# Altium PCB COREV1.1_pcb5_0.PcbDoc (part 5 of 14)
Units mil, origin at the board's own origin, x right, y up, seen from the top; angles counter-clockwise.
Board outline 2860 x 2420 mil, 6 copper layers (Top Layer, GND, SIGNAL_1, SIGNAL_2, POWER, Bottom Layer); 110 components, 241 nets, 882 pads, 697 vias.
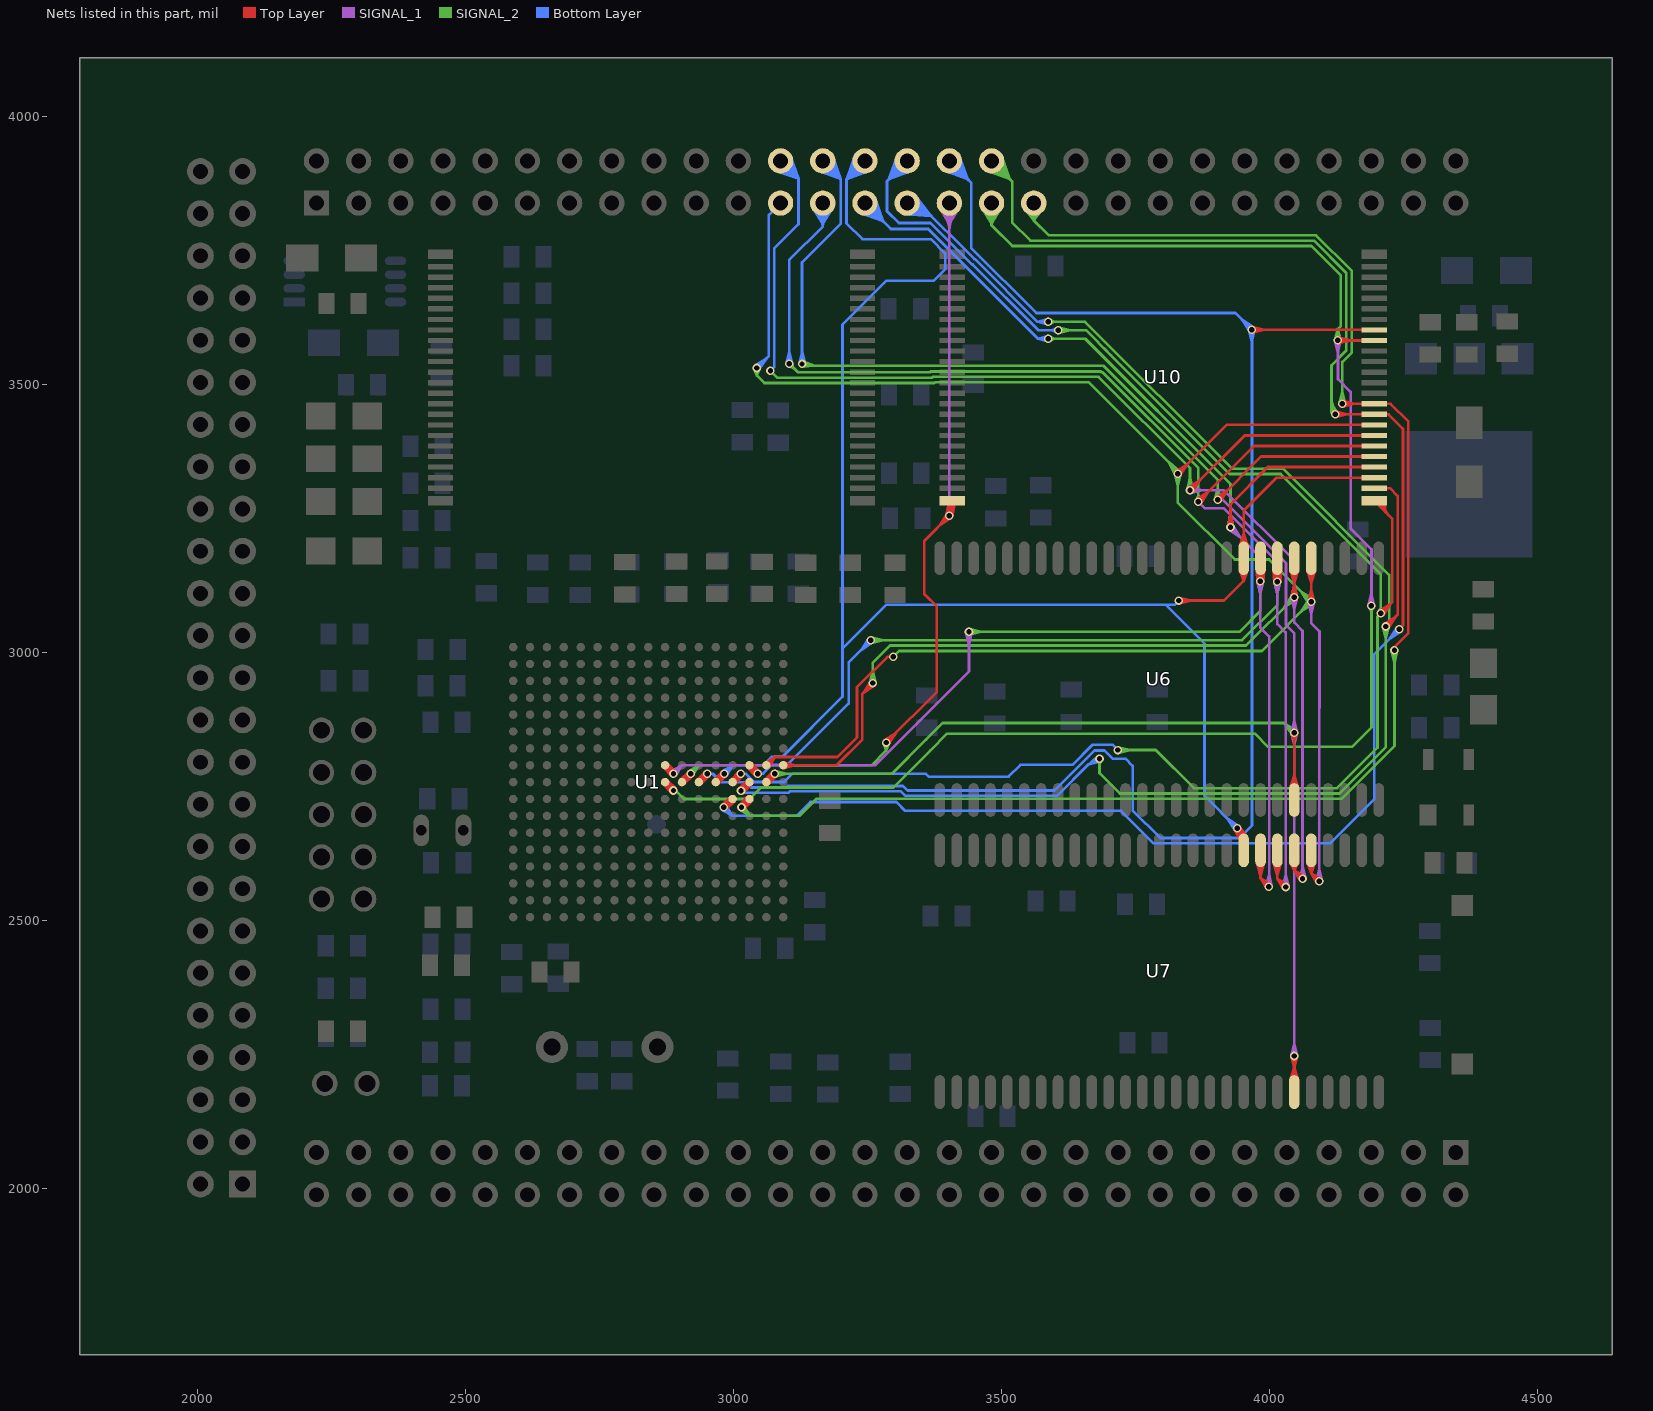
[diagram p9: the nets of this part, all layers, seen from the top]

## Via types
v1: diameter 16, hole 10, Top Layer to Bottom Layer, tented both sides, 638 vias
v2: diameter 30, hole 18, Top Layer to Bottom Layer, tented both sides, 56 vias
v3: diameter 16, hole 10, Top Layer to Bottom Layer, 2 vias
v4: diameter 30, hole 16, Top Layer to Bottom Layer, tented both sides, 1 vias

## Nets (pads, with @x,y where several pads share a name; then routed paths per layer and width w, separated by ;. In a path a pad name is that pad's centre, name@x,y a point inside that pad or via, vN(x,y) a via of type N, cw(c..) or ccw(c..) an arc to the next point about the centre after c; other vN are vias at no path point) (continued)
LADDR9: pad.PC23 U1.B8 U6.32 U7.32 U10.8 | length 5032.9
  Top Layer w5: U1.B8@3058.06,2793.87 3076.73,2805 ; U1.B8@3061.36,2795 ccw(c3061.36,2807.98) 3070.53,2798.8 ccw(c3079.71,2789.63) U1.B8@3066.73,2789.63 ; U1.B8@3064.11,2789.63 U1.B8@3061.36,2789.63 3076.73,2805 ; U1.B8@3065.6,2786.33 3076.73,2805 ; v1(3298,2992) 3287.08,2992 3230.5,2935.42 3230.5,2841.7 3193.8,2805 3076.73,2805 ; v1@3825.54,3337.77 3847.61,3352.11 v1@3833.27,3330.04 ; v1(3829,3333.5) 3920.28,3424.78 3948,3424.78 ; v1@3829,3339 ccw(c3829,3352.28) 3838.39,3342.89 ccw(c3847.78,3333.5) v1@3834.5,3333.5 ; 3944.78,3424.78 3948,3424.78 ; U7.32@4070.81,2607.99 4078.04,2587.96 ; U6.32@4070.78,3153.18 4078.04,3129.42 ; v1@4072.58,3095.66 4078.04,3118 v1@4083.5,3095.66 ; U7.32@4072.85,2604.07 cw(c4060.31,2591.53) 4078.04,2591.53 cw(c4095.77,2591.53) U7.32@4083.23,2604.07 ; U6.32@4072.85,3149.07 cw(c4060.31,3136.53) 4078.04,3136.53 cw(c4095.77,3136.53) U6.32@4083.23,3149.07 ; v1@4074.15,3098.89 ccw(c4064.76,3108.28) 4078.04,3108.28 ccw(c4091.32,3108.28) v1@4081.93,3098.89 ; U7.32@4078.04,2609.26 4078.04,2587.96 ; U7.32@4078.04,2630.91 4078.04,2587.96 ; v1(4078.04,3095) U6.32@4078.04,3175.91 ; U6.32@4078.04,3154.26 4078.04,3129.42 ; U7.32@4085.27,2607.99 4078.04,2587.96 ; U6.32@4085.3,3153.18 4078.04,3129.42 ; v1@4087.5,2573 ccw(c4074.22,2573) 4083.61,2582.39 ccw(c4093,2591.78) v1@4093,2578.5 ; v1@4088.64,2569.65 4078.04,2587.96 ; v1@4096.35,2577.36 4078.04,2587.96 ; 4157.2,3424.78 U10.8@4177.13,3424.78 ; U10.8@4175.41,3423.07 ccw(c4171.28,3418.94) 4171.28,3424.78 ccw(c4171.28,3430.63) U10.8@4175.41,3426.5 ; U10.8@4195.83,3424.78 3948,3424.78 ; 4078.04,2587.96 v1(4093,2573) 4078.04,2587.96
  SIGNAL_1 w5: v1@4072.58,3094.34 4078.04,3072 v1@4083.5,3094.34 ; v1@4074.15,3091.11 cw(c4064.76,3081.72) 4078.04,3081.72 cw(c4091.32,3081.72) v1@4081.93,3091.11 ; v1(4078.04,3095) 4078.04,3054.96 4093.54,3039.46 4093.54,2896.62 ; v1@4087.54,2573.66 4093,2596 v1@4098.46,2573.66 ; v1@4089.11,2576.89 ccw(c4079.72,2586.28) 4093,2586.28 ccw(c4106.28,2586.28) v1@4096.89,2576.89 ; v1(4093,2573) 4093,2896.08
  SIGNAL_2 w5: v1@3038.11,3529.92 3043.5,3517 ; v1@3039.61,3527.11 cw(c3030.22,3517.72) 3043.5,3517.72 cw(c3056.78,3517.72) v1@3047.39,3527.11 ; v1(3043.5,3531) 3043.5,3517 ; v1@3048.89,3529.92 3043.5,3517 ; v1(3298,2992) 3309,3003 3986.04,3003 v1(4078.04,3095) ; 3374.86,3503 3057.5,3503 3043.5,3517 ; 3376.36,3504.5 3662.92,3504.5 3829,3338.42 v1(3829,3333.5) ; 3816.13,3351.29 cw(c3798.34,3333.5) v1@3823.5,3333.5 ; v1@3823.54,3332.84 3829,3310.5 ; v1@3824.32,3330.6 3812.48,3354.94 ; 3824.67,3342.75 cw(c3815.41,3333.5) v1@3828.5,3333.5 ; v1@3825.11,3329.61 cw(c3815.72,3320.22) 3829,3320.22 cw(c3842.28,3320.22) v1@3832.89,3329.61 ; v1@3832.99,3337.28 3812.48,3354.94 ; v1@3834.46,3332.84 3829,3310.5 ; v1@4073.77,3091.54 4059.43,3113.61 ; v1@4073.77,3098.46 4059.43,3076.39 ; v1@4078.04,3089.5 ccw(c4078.04,3076.22) 4068.65,3085.61 ccw(c4059.26,3095) 4072.54,3095 ccw(c4059.26,3095) 4068.65,3104.39 ccw(c4078.04,3113.78) v1@4078.04,3100.5 ; v1@4081.5,3090.73 4059.43,3076.39 ; v1@4081.5,3099.27 4059.43,3113.61 ; 3812.48,3354.94 v1(3829,3333.5) ; 3829,3310.5 v1(3829,3333.5) ; v1(3829,3333.5) 3829,3280 3935.5,3173.5 3999.54,3173.5 v1(4078.04,3095) ; 4059.43,3076.39 v1(4078.04,3095) ; 4059.43,3113.61 v1(4078.04,3095)
  Bottom Layer w5: v1@3040.04,3535.27 3062.11,3549.61 v1@3047.77,3527.54 ; v1(3043.5,3531) 3066,3553.5 3066,3816.77 pad.PC23@3087.94,3838.71 ; v1@3043.5,3536.5 ccw(c3043.5,3549.78) 3052.89,3540.39 ccw(c3062.28,3531) v1@3049,3531
LADDR10: pad.PC24 U1.A8 U6.33 U7.33 U10.7 | length 5512.6
  Top Layer w5: U1.A8@3092.85,2789.63 3192.57,2789.63 3240.5,2837.56 3240.5,2922.5 v1@3260.5,2942.5 ; U1.A8@3093.49,2784.29 3115.73,2789.63 U1.A8@3093.49,2794.97 ; U1.A8@3096.65,2785.83 cw(c3105.83,2776.66) 3105.83,2789.63 cw(c3105.83,2802.6) U1.A8@3096.65,2793.43 ; 3249.9,2931.9 ccw(c3238.81,2943) v1@3254.5,2943 ; 3252.32,2934.32 cw(c3260,2926.64) v1@3260,2937.5 ; v1@3255.63,2946.34 3242.08,2924.08 ; v1(3260,2943) 3242.08,2924.08 ; v1@3263.57,2938.82 3242.08,2924.08 ; v1@3848.54,3307.27 3870.61,3321.61 v1@3856.27,3299.54 ; v1(3852,3303) 3954.1,3405.1 U10.7@4195.83,3405.1 ; v1@3852,3308.5 ccw(c3852,3321.78) 3861.39,3312.39 ccw(c3870.78,3303) v1@3857.5,3303 ; U6.33@4039.28,3153.18 4046.54,3129.42 ; U7.33@4039.4,2607.55 4046.54,2593.46 ; v1@4041.08,3103.66 4046.54,3126 v1@4052,3103.66 ; U6.33@4041.35,3149.07 cw(c4028.82,3136.53) 4046.54,3136.53 cw(c4064.27,3136.53) U6.33@4051.74,3149.07 ; U7.33@4041.81,2603.65 cw(c4033.21,2593.46) 4046.54,2593.46 ; v1@4042.65,3106.89 ccw(c4033.27,3116.28) 4046.54,3116.28 ccw(c4059.82,3116.28) v1@4050.43,3106.89 ; U7.33@4046.54,2609.26 4046.54,2593.46 ; U7.33@4046.54,2630.91 4046.54,2593.46 ; v1(4046.54,3103) U6.33@4046.54,3175.91 ; U6.33@4046.54,3154.26 4046.54,3129.42 ; U7.33@4051.28,2603.65 ccw(c4059.88,2593.46) 4046.54,2593.46 ; U7.33@4053.69,2607.55 4046.54,2593.46 ; U6.33@4053.81,3153.18 4046.54,3129.42 ; v1@4056.5,2578 ccw(c4043.22,2578) 4052.61,2587.39 ccw(c4062,2596.78) v1@4062,2583.5 ; v1@4057.65,2574.63 4046.54,2593.46 ; v1@4065.37,2582.35 4046.54,2593.46 ; 4157.2,3405.1 U10.7@4177.13,3405.1 ; U10.7@4175.41,3403.39 ccw(c4171.28,3399.25) 4171.28,3405.1 ccw(c4171.28,3410.94) U10.7@4175.41,3406.81 ; 4046.54,2593.46 v1(4062,2578) 4046.54,2593.46
  SIGNAL_1 w5: v1(3852,3303) 3914.86,3303 4046.54,3171.31 v1(4046.54,3103) 4046.54,3055.96 4062.04,3040.46 4062.04,2873.04 4062,2873 v1(4062,2578) ; v1@3852.66,3297.54 3875,3303 v1@3852.66,3308.46 ; v1@3855.89,3299.11 cw(c3865.28,3289.72) 3865.28,3303 cw(c3865.28,3316.28) v1@3855.89,3306.89 ; v1@4041.08,3102.34 4046.54,3080 v1@4052,3102.34 ; v1@4041.08,3103.66 4046.54,3126 v1@4052,3103.66 ; v1@4042.65,3099.11 cw(c4033.27,3089.72) 4046.54,3089.72 cw(c4059.82,3089.72) v1@4050.43,3099.11 ; v1@4042.65,3106.89 ccw(c4033.27,3116.28) 4046.54,3116.28 ccw(c4059.82,3116.28) v1@4050.43,3106.89 ; v1@4056.54,2578.66 4062,2601 v1@4067.46,2578.66 ; v1@4058.11,2581.89 ccw(c4048.72,2591.28) 4062,2591.28 ccw(c4075.28,2591.28) v1@4065.89,2581.89
  SIGNAL_2 w5: v1(3069,3525.5) 3081.5,3513 3370.72,3513 3372.22,3514.5 3681.5,3514.5 3852,3344 v1(3852,3303) ; v1@3254.54,2943.67 3260.06,2966 ; v1@3256.11,2946.89 ccw(c3246.59,2956.41) 3260.06,2956.41 ; v1(3260,2943) 3260.06,2966 ; v1@3260.06,2943.06 3260.06,2981.06 3292,3013 3956.54,3013 v1(4046.54,3103) 4027.94,3084.39 ; 3260.06,2956.14 ccw(c3273.14,2956.14) v1@3263.89,2946.89 ; v1@3265.46,2943.64 3260.06,2966 ; v1@3846.54,3303.66 3852,3326 v1@3857.46,3303.66 ; v1@3848.11,3306.89 ccw(c3838.72,3316.28) 3852,3316.28 ccw(c3865.28,3316.28) v1@3855.89,3306.89 ; v1@4041.04,3103 cw(c4027.77,3103) 4037.15,3093.61 cw(c4046.54,3084.22) v1@4046.54,3097.5 ; v1@4042.27,3106.46 4027.94,3084.39 ; v1@4050.01,3098.73 4027.94,3084.39
  Bottom Layer w5: v1(3069,3525.5) 3076,3532.5 3076,3754 3121.5,3799.5 3121.5,3883.89 ; pad.PC24@3076.7,3899.56 3121.5,3883.89 ; pad.PC24@3078.64,3904.28 3121.5,3883.89 ; pad.PC24@3081.05,3908.72 3121.5,3883.89 ; pad.PC24@3083.9,3912.85 3121.5,3883.89 ; pad.PC24@3087.94,3917.45 3121.5,3883.89 ; pad.PC24@3088.52,3906.34 cw(c3089.69,3883.86) 3105.61,3899.78 cw(c3121.53,3915.7) pad.PC24@3099.04,3916.87 ; pad.PC24@3088.78,3901.35 cw(c3090.47,3868.75) 3113.55,3891.83 cw(c3136.63,3914.91) pad.PC24@3104.04,3916.61 ; pad.PC24@3089.04,3896.35 cw(c3091.26,3853.65) 3121.5,3883.89 ; pad.PC24@3092.54,3921.49 3121.5,3883.89 ; pad.PC24@3096.67,3924.34 3121.5,3883.89 ; pad.PC24@3101.11,3926.75 3121.5,3883.89 ; pad.PC24@3105.82,3928.69 3121.5,3883.89 ; pad.PC24@3109.03,3916.35 ccw(c3151.73,3914.12) 3121.5,3883.89
LADDR11: pad.PC25 U1.C8 U6.34 U7.34 U10.6 | length 5719.7
  Top Layer w5: U1.C8@3029.86,2784.26 cw(c3029.86,2772.47) 3038.2,2780.8 ; U1.C8@3035.24,2789.63 ccw(c3049.4,2789.63) v1@3039.38,2779.62 ; v1@3039.5,2774 ccw(c3026.22,2774) 3035.61,2783.39 ccw(c3045,2792.78) v1@3045,2779.5 ; v1@3039.92,2771.88 U1.C8@3034.15,2792.86 ; v1@3040.6,2770.7 U1.C8@3029.86,2789.63 ; v1@3040.64,2770.64 U1.C8@3029.86,2789.14 ; v1@3041.54,2769.73 U1.C8@3026.49,2785.44 ; v1@3047.28,2779.01 U1.C8@3026.49,2785.44 ; v1@3048.36,2778.36 U1.C8@3029.86,2789.14 ; v1@3048.44,2778.3 U1.C8@3029.86,2789.63 ; v1@3049.38,2777.32 U1.C8@3034.15,2792.86 ; v1@3864.04,3285.77 3886.11,3300.11 v1@3871.77,3278.04 ; v1(3867.5,3281.5) 3971.41,3385.41 U10.6@4195.83,3385.41 ; v1@3867.5,3287 ccw(c3867.5,3300.28) 3876.89,3290.89 ccw(c3886.28,3281.5) v1@3873,3281.5 ; U7.34@4007.79,2608.18 4015.05,2584.42 ; v1@4009.54,3132.66 4015,3155 4020.46,3132.66 U6.34@4015.05,3154.26 ; v1@4009.54,3132.69 U6.34@4015.05,3154.26 ; v1@4009.62,3130.88 U6.34@4007.8,3153.07 ; U7.34@4009.86,2604.07 cw(c3997.32,2591.53) 4015.05,2591.53 cw(c4032.77,2591.53) U7.34@4020.24,2604.07 ; U6.34@4009.86,3149.07 cw(c3997.44,3136.65) v1@4015,3136.65 ; v1@4010.07,3134.43 U6.34@4022.29,3153.03 ; v1@4011.11,3135.89 ccw(c4001.72,3145.28) 4015,3145.28 ccw(c4028.28,3145.28) v1@4018.89,3135.89 ; v1@4015,3136.42 cw(c4032.89,3136.42) U6.34@4020.24,3149.07 ; U7.34@4015.05,2609.26 4015.05,2584.42 ; U7.34@4015.05,2630.91 4015.05,2577.95 ; U6.34@4015.05,3175.91 U6.34@4015.05,3175.91 v1(4015,3132) ; v1@4019.95,3134.41 U6.34@4007.8,3153.07 ; v1@4020.38,3130.86 U6.34@4022.29,3153.03 ; U7.34@4022.31,2608.18 4015.05,2584.42 ; v1@4025.05,2562.45 ccw(c4011.77,2562.45) 4021.16,2571.84 ccw(c4030.55,2581.23) v1@4030.55,2567.95 ; v1@4026.2,2559.08 4015.05,2577.95 ; v1@4033.92,2566.8 4015.05,2577.95 ; 4157.2,3385.41 U10.6@4177.13,3385.41 ; U10.6@4175.41,3383.7 ccw(c4171.28,3379.57) 4171.28,3385.41 ccw(c4171.28,3391.26) U10.6@4175.41,3387.12 ; U1.C8@3026.49,2785.44 v1(3045,2774) ; U1.C8@3026.49,2785.44 v1(3045,2774) ; U1.C8@3029.86,2789.14 U1.C8@3029.86,2789.63 ; U1.C8@3029.86,2789.14 v1(3045,2774) ; U1.C8@3029.86,2789.14 v1(3045,2774) ; U1.C8@3029.86,2789.63 v1(3045,2774) ; U1.C8@3029.86,2789.63 v1(3045,2774) ; U1.C8@3034.15,2792.86 v1(3045,2774) ; U1.C8@3034.15,2792.86 v1(3045,2774) ; U6.34@4007.8,3153.07 v1(4015,3132) ; v1(4015,3132) U6.34@4022.29,3153.03 ; v1(4015,3132) U6.34@4015.05,3154.26 ; 4015.05,2577.95 v1(4030.55,2562.45) 4015.05,2577.95
  SIGNAL_1 w5: v1(3867.5,3281.5) v1@3868,3281 ; v1@3869.8,3282.8 v1@3868,3281 ; v1@4009.54,3131.34 4015,3109 v1@4020.46,3131.34 ; v1@4009.54,3132.66 4015,3155 v1@4020.46,3132.66 ; v1@4011.11,3128.11 cw(c4001.72,3118.72) 4015,3118.72 cw(c4028.28,3118.72) v1@4018.89,3128.11 ; v1@4011.11,3135.89 ccw(c4001.72,3145.28) 4015,3145.28 ccw(c4028.28,3145.28) v1@4018.89,3135.89 ; v1@4025.09,2563.11 4030.55,2585.45 v1@4036.01,2563.11 ; v1@4026.66,2566.34 ccw(c4017.27,2575.73) 4030.55,2575.73 ccw(c4043.83,2575.73) v1@4034.44,2566.34 ; v1(4030.55,2562.45) 4030.55,3037.53 4015,3053.07 v1(4015,3132) 4015,3169 3915,3269 3880,3269 v1@3868,3281
  SIGNAL_2 w5: v1@3104,3533.5 cw(c3104,3520.22) 3113.39,3529.61 cw(c3122.78,3539) v1@3109.5,3539 ; v1(3104,3539) 3120,3523 3366.57,3523 3368.07,3524.5 3685.64,3524.5 3687.14,3523 3688.86,3523 3867.5,3344.36 v1(3867.5,3281.5) ; v1(3256.5,3023) 3949,3023 4015.05,3089.05 v1(4015,3132) v1(4015,3132) 4015.05,3109 ; v1@3257.16,3017.54 3279.5,3023 v1@3257.16,3028.46 ; v1@3260.39,3019.11 cw(c3269.78,3009.72) 3269.78,3023 cw(c3269.78,3036.28) v1@3260.39,3026.89 ; v1@3863.61,3285.39 ccw(c3854.22,3294.78) 3867.5,3294.78 ccw(c3880.78,3294.78) v1@3871.39,3285.39 ; v1@4009.54,3131.33 4015.05,3109 ; v1@4011.11,3128.11 cw(c4001.61,3118.61) 4015.05,3118.61 ; 4015.05,3118.84 cw(c4028.16,3118.84) v1@4018.89,3128.11 ; v1@4020.46,3131.35 4015.05,3109
  Bottom Layer w5: v1(3045,2774) 3055.3,2774 3071.3,2790 3100,2790 3215,2905 3215,2981.5 v1(3256.5,3023) 3237.89,3004.39 ; v1@3098.54,3539.66 3104,3562 v1@3109.46,3539.66 ; v1@3100.11,3542.89 ccw(c3090.72,3552.28) 3104,3552.28 ccw(c3117.28,3552.28) v1@3107.89,3542.89 ; v1(3104,3539) 3104,3732.5 3166.68,3795.18 ; pad.PC25@3146.36,3832.93 3166.68,3800.09 ; pad.PC25@3150.91,3835.34 3166.68,3800.09 ; pad.PC25@3153.61,3822.12 cw(c3132.39,3795.18) 3166.68,3795.18 ; pad.PC25@3155.67,3837.11 3166.68,3800.09 ; pad.PC25@3156.7,3826.04 cw(c3140.51,3805.48) 3166.68,3805.48 cw(c3192.85,3805.48) pad.PC25@3176.65,3826.04 ; pad.PC25@3160.58,3838.22 3166.68,3800.09 ; pad.PC25@3172.78,3838.22 3166.68,3800.09 ; pad.PC25@3177.68,3837.11 3166.68,3800.09 ; pad.PC25@3179.75,3822.12 ccw(c3200.97,3795.18) 3166.68,3795.18 ; pad.PC25@3182.44,3835.34 3166.68,3800.09 ; pad.PC25@3186.99,3832.93 3166.68,3800.09 ; v1@3251,3023 cw(c3237.72,3023) 3247.11,3013.61 cw(c3256.5,3004.22) v1@3256.5,3017.5 ; v1@3252.23,3026.46 3237.89,3004.39 ; v1@3259.96,3018.73 3237.89,3004.39 ; 3166.68,3795.18 pad.PC25@3166.68,3838.71 3166.68,3800.09
LADDR12: pad.PC26 U1.B9 U6.22 U7.22 U10.5 | length 5876.2
  Top Layer w5: U1.B9@3061.36,2763.51 ccw(c3061.36,2776.48) 3070.53,2767.31 ccw(c3079.71,2758.13) U1.B9@3066.73,2758.13 ; v1@3071.5,2773.78 cw(c3058.22,2773.78) 3067.61,2764.39 cw(c3077,2755) v1@3077,2768.28 ; v1@3071.97,2776 U1.B9@3065.59,2754.82 ; v1@3072.66,2777.15 U1.B9@3061.36,2758.13 ; v1@3073.6,2778.1 U1.B9@3058.05,2762.37 ; v1@3079.23,2768.75 U1.B9@3058.05,2762.37 ; v1@3080.38,2769.43 U1.B9@3061.36,2758.13 ; v1@3081.32,2770.38 U1.B9@3065.59,2754.82 ; v1@3900.54,3289.27 3922.61,3303.61 v1@3908.27,3281.54 ; v1(3904,3285) 3984.73,3365.73 U10.5@4195.83,3365.73 ; v1@3904,3290.5 ccw(c3904,3303.78) 3913.39,3294.39 ccw(c3922.78,3285) v1@3909.5,3285 ; U7.22@4039.28,2202.47 4046.54,2226.23 ; U6.22@4039.28,2747.47 4046.54,2771.23 ; v1@4041.08,2246.34 4046.54,2224 v1@4052,2246.34 ; v1@4041.11,2848.96 4046.5,2836.04 ; U7.22@4041.35,2206.58 ccw(c4028.82,2219.11) 4046.54,2219.11 ccw(c4064.27,2219.11) U7.22@4051.74,2206.58 ; U6.22@4041.35,2751.58 ccw(c4028.82,2764.11) 4046.54,2764.11 ccw(c4064.27,2764.11) U6.22@4051.74,2751.58 ; v1@4042.61,2846.15 cw(c4033.22,2836.77) 4046.5,2836.77 cw(c4059.78,2836.77) v1@4050.39,2846.15 ; v1@4042.65,2243.11 cw(c4033.27,2233.72) 4046.54,2233.72 cw(c4059.82,2233.72) v1@4050.43,2243.11 ; v1(4046.5,2850.04) 4046.5,2836.04 ; U7.22@4046.54,2179.73 v1(4046.54,2247) ; U7.22@4046.54,2201.39 4046.54,2226.23 ; U6.22@4046.54,2724.73 4046.54,2836 ; U6.22@4046.54,2746.39 4046.54,2771.23 ; v1@4051.89,2848.96 4046.5,2836.04 ; U7.22@4053.81,2202.47 4046.54,2226.23 ; U6.22@4053.81,2747.47 4046.54,2771.23 ; 4157.2,3365.73 U10.5@4177.13,3365.73 ; U10.5@4175.41,3364.02 ccw(c4171.28,3359.88) 4171.28,3365.73 ccw(c4171.28,3371.57) U10.5@4175.41,3367.44 ; U1.B9@3058.05,2762.37 v1(3077,2773.78) ; U1.B9@3058.05,2762.37 v1(3077,2773.78) ; U1.B9@3061.36,2758.13 v1(3077,2773.78) ; U1.B9@3061.36,2758.13 v1(3077,2773.78) ; U1.B9@3065.59,2754.82 v1(3077,2773.78) ; U1.B9@3065.59,2754.82 v1(3077,2773.78)
  SIGNAL_1 w5: 3913.14,3285 4031,3167.14 4031,3051.22 4046.54,3035.67 4046.54,2850.09 v1(4046.5,2850.04) ; v1@4041.04,2849.39 4046.5,2827.04 v1@4051.96,2849.39 ; v1@4041.04,2850.71 4046.54,2873.04 ; v1@4041.08,2247.65 4046.5,2270 ; v1@4042.61,2846.15 cw(c4033.22,2836.77) 4046.5,2836.77 cw(c4059.78,2836.77) v1@4050.39,2846.15 ; v1@4042.61,2853.93 ccw(c4033.12,2863.43) 4046.54,2863.43 ; v1@4042.65,2250.89 ccw(c4033.37,2260.17) 4046.5,2260.17 ; v1(4046.54,2247) v1(4046.5,2850.04) ; 4046.5,2260.38 ccw(c4059.93,2260.38) v1@4050.43,2250.89 ; v1(4046.54,2247) 4046.5,2270 ; 4046.54,2863.22 ccw(c4059.67,2863.22) v1@4050.39,2853.93 ; v1@4051.96,2850.69 4046.54,2873.04 ; v1@4052,2247.67 4046.5,2270 ; v1(4046.5,2850.04) 4046.54,2873.04
  SIGNAL_2 w5: v1(3077,2773.78) 3295.43,2773.78 3359.15,2837.5 ; v1@3077.66,2768.32 3100,2773.78 v1@3077.66,2779.24 ; v1@3080.89,2769.89 cw(c3090.28,2760.5) 3090.28,2773.78 cw(c3090.28,2787.05) v1@3080.89,2777.67 ; v1@3127.83,3533 3152.17,3535 ; v1(3128,3538.5) 3152.17,3535 ; v1@3128.35,3538.85 ccw(c3137.66,3548.16) 3137.66,3535 ; v1@3129.4,3543.82 3152.17,3535 ; v1@3131.5,3535 3691,3535 3904,3322 v1(3904,3285) ; v1@3131.89,3542.39 ccw(c3149.73,3560.23) 3149.73,3535 ; 3359.21,2837.5 3390.21,2868.5 4028.04,2868.5 ; v1@3898.54,3285.66 3904,3308 v1@3909.46,3285.66 ; v1@3900.11,3288.89 ccw(c3890.72,3298.28) 3904,3298.28 ccw(c3917.28,3298.28) v1@3907.89,3288.89 ; v1@4041,2850.04 ccw(c4027.72,2850.04) 4037.11,2859.43 ccw(c4046.5,2868.82) v1@4046.5,2855.54 ; v1@4042.22,2846.59 4028.04,2868.5 ; v1@4049.96,2854.32 4028.04,2868.5 ; 4028.04,2868.5 v1(4046.5,2850.04) 4028.04,2868.5
  Bottom Layer w5: v1@3122.54,3539.16 3128,3561.5 v1@3133.46,3539.16 ; v1@3124.11,3542.39 ccw(c3114.72,3551.78) 3128,3551.78 ccw(c3141.28,3551.78) v1@3131.89,3542.39 ; v1(3128,3538.5) 3128,3728 3200.5,3800.5 3200.5,3883.63 ; pad.PC26@3155.41,3899.58 3200.5,3883.63 ; pad.PC26@3157.36,3904.29 3200.5,3883.63 ; pad.PC26@3159.78,3908.72 3200.5,3883.63 ; pad.PC26@3162.64,3912.85 3200.5,3883.63 ; pad.PC26@3166.68,3917.45 3200.5,3883.63 ; pad.PC26@3167.19,3906.34 cw(c3168.26,3883.41) 3184.49,3899.64 cw(c3200.72,3915.87) pad.PC26@3177.79,3916.93 ; pad.PC26@3167.42,3901.34 cw(c3168.97,3868.11) 3192.49,3891.63 cw(c3216.02,3915.16) pad.PC26@3182.78,3916.7 ; pad.PC26@3167.66,3896.35 cw(c3169.67,3852.8) 3200.5,3883.63 ; pad.PC26@3171.28,3921.49 3200.5,3883.63 ; pad.PC26@3175.4,3924.34 3200.5,3883.63 ; pad.PC26@3179.84,3926.76 3200.5,3883.63 ; pad.PC26@3184.54,3928.72 3200.5,3883.63 ; pad.PC26@3187.78,3916.47 ccw(c3231.32,3914.45) 3200.5,3883.63
LADDR13: pad.PC27 U1.H8 U6.35 U7.35 U10.4 | length 5711.7
  Top Layer w5: U1.H8@2872.38,2784.26 cw(c2872.38,2771.28) 2881.56,2780.46 cw(c2890.73,2789.63) U1.H8@2877.76,2789.63 ; 2878.59,2783.42 cw(c2869.16,2773.99) v1@2882.5,2773.99 ; 2878.65,2783.36 ccw(c2888,2792.71) v1@2888,2779.49 ; v1@2882.97,2771.76 U1.H8@2876.62,2792.94 ; v1@2883.65,2770.62 U1.H8@2872.38,2789.63 ; v1@2884.6,2769.67 U1.H8@2869.07,2785.4 ; v1@2890.23,2779.02 U1.H8@2869.07,2785.4 ; v1@2891.38,2778.33 U1.H8@2872.38,2789.63 ; v1@2892.33,2777.38 U1.H8@2876.62,2792.94 ; v1@3922.04,3234.16 3927.5,3256.5 v1@3932.96,3234.16 ; v1@3923.61,3237.39 ccw(c3914.22,3246.78) 3927.5,3246.78 ccw(c3940.78,3246.78) v1@3931.39,3237.39 ; v1(3927.5,3233.5) 3927.5,3276.5 3997.04,3346.04 U10.4@4195.83,3346.04 ; U7.35@3976.29,2608.18 3983.55,2584.42 ; v1@3977.54,3133.66 3983,3156 v1@3988.46,3133.66 ; v1@3977.57,3133.85 U6.35@3983.55,3154.26 ; v1@3977.6,3131.95 U6.35@3976.29,3153.18 ; v1@3978.18,3135.65 U6.35@3990.75,3152.81 ; U7.35@3978.36,2604.07 cw(c3965.83,2591.53) 3983.55,2591.53 cw(c4001.28,2591.53) U7.35@3988.74,2604.07 ; U6.35@3978.36,3149.07 cw(c3967.16,3137.87) v1@3983,3137.87 ; v1@3979.11,3136.89 ccw(c3969.72,3146.28) 3983,3146.28 ccw(c3996.28,3146.28) v1@3986.89,3136.89 ; v1@3983,3135.2 cw(c4002.61,3135.2) U6.35@3988.74,3149.07 ; U7.35@3983.55,2609.26 3983.55,2584.42 ; U7.35@3983.55,2630.91 3983.55,2578.45 ; U6.35@3983.55,3175.91 3983,3175.36 v1(3983,3133) ; v1@3987.95,3135.4 U6.35@3976.29,3153.18 ; v1@3988.34,3131.68 U6.35@3990.75,3152.81 ; v1@3988.47,3133.57 U6.35@3983.55,3154.26 ; U7.35@3990.81,2608.18 3983.55,2584.42 ; v1@3993.5,2563 ccw(c3980.22,2563) 3989.61,2572.39 ccw(c3999,2581.78) v1@3999,2568.5 ; v1@3994.65,2559.63 3983.55,2578.45 ; v1@4002.37,2567.35 3983.55,2578.45 ; 4157.2,3346.04 U10.4@4177.13,3346.04 ; U10.4@4175.41,3344.33 ccw(c4171.28,3340.2) 4171.28,3346.04 ccw(c4171.28,3351.89) U10.4@4175.41,3347.75 ; U1.H8@2869.07,2785.4 v1(2888,2773.99) ; U1.H8@2869.07,2785.4 v1(2888,2773.99) ; U1.H8@2872.38,2789.63 v1(2888,2773.99) ; U1.H8@2872.38,2789.63 v1(2888,2773.99) ; U1.H8@2876.62,2792.94 v1(2888,2773.99) ; U1.H8@2876.62,2792.94 v1(2888,2773.99) ; U6.35@3976.29,3153.18 v1(3983,3133) ; v1(3983,3133) U6.35@3990.75,3152.81 ; v1(3983,3133) U6.35@3983.55,3154.26 ; 3983.55,2578.45 v1(3999,2563) 3983.55,2578.45
  SIGNAL_1 w5: v1@2884.66,2778.36 2903.75,2789.5 ; v1(2888,2773.99) 2903.75,2789.5 ; v1@2888,2779.49 ccw(c2888,2793.34) 2897.79,2783.54 ; v1@2888.24,2773.99 2903.75,2789.5 ; v1@2892.32,2770.58 2903.75,2789.5 ; v1@2893.5,2773.99 cw(c2906.21,2773.99) 2897.22,2782.97 ; 3168.5,2789.5 3141,2789.5 ; v1@3434.04,3037.84 3439.5,3015.5 v1@3444.96,3037.84 ; v1@3435.61,3034.61 cw(c3426.22,3025.22) 3439.5,3025.22 cw(c3452.78,3025.22) v1@3443.39,3034.61 ; v1(3439.5,3038.5) 3439.5,2964.5 3264.5,2789.5 3141,2789.5 ; v1@3924.04,3229.23 3946.11,3214.89 v1@3931.77,3236.96 ; v1@3927.5,3228 cw(c3927.5,3214.72) 3936.89,3224.11 cw(c3946.28,3233.5) v1@3933,3233.5 ; v1(3927.5,3233.5) 3983,3178 v1(3983,3133) 3983,3046.5 3999.55,3029.95 v1@3999.55,2563.55 ; v1@3977.54,3132.34 3983,3110 v1@3988.46,3132.34 ; v1@3977.54,3133.66 3983,3156 v1@3988.46,3133.66 ; v1@3979.11,3129.11 cw(c3969.72,3119.72) 3983,3119.72 cw(c3996.28,3119.72) v1@3986.89,3129.11 ; v1@3979.11,3136.89 ccw(c3969.72,3146.28) 3983,3146.28 ccw(c3996.28,3146.28) v1@3986.89,3136.89 ; v1@3993.56,2563.79 3999.55,2586.02 ; v1@3995.11,2566.89 ccw(c3984.4,2577.6) 3999.55,2577.6 ; v1(3999,2563) 3999.55,2586.02 ; 3999.55,2574.96 ccw(c4010.96,2574.96) v1@4002.89,2566.89 ; v1@4004.47,2563.53 3999.55,2586.02 ; 2903.75,2789.5 3141,2789.5
  SIGNAL_2 w5: v1@3439.5,3033 v1(3439.5,3038.5) 3944.5,3038.5 3983,3077 v1(3983,3133) 3983,3110 ; v1@3440.16,3033.04 3462.5,3038.5 v1@3440.16,3043.96 ; v1@3443.39,3034.61 cw(c3452.78,3025.22) 3452.78,3038.5 cw(c3452.78,3051.78) v1@3443.39,3042.39 ; v1(3587.5,3585.5) 3656.5,3585.5 3927.5,3314.5 v1(3927.5,3233.5) ; v1@3591.39,3581.61 cw(c3600.78,3572.22) 3600.78,3585.5 cw(c3600.78,3598.78) v1@3591.39,3589.39 ; v1@3922.04,3234.16 3927.5,3256.5 v1@3932.96,3234.16 ; v1@3923.61,3237.39 ccw(c3914.22,3246.78) 3927.5,3246.78 ccw(c3940.78,3246.78) v1@3931.39,3237.39 ; v1@3977.54,3132.34 3983,3110 ; v1@3979.11,3129.11 cw(c3969.72,3119.72) 3983,3119.72 cw(c3996.28,3119.72) v1@3986.89,3129.11 ; v1@3988.46,3132.34 3983,3110
  Bottom Layer w5: pad.PC27@3234.1,3820.87 3279.65,3804.48 ; pad.PC27@3236.08,3825.57 3279.65,3804.48 ; pad.PC27@3238.51,3829.99 3279.65,3804.48 ; pad.PC27@3241.37,3834.11 3279.65,3804.48 ; pad.PC27@3245.42,3817.59 cw(c3245.42,3766.59) 3281.48,3802.65 cw(c3317.53,3838.71) pad.PC27@3266.54,3838.71 ; pad.PC27@3245.42,3822.59 cw(c3245.42,3783.66) 3272.94,3811.19 cw(c3300.46,3838.71) pad.PC27@3261.54,3838.71 ; pad.PC27@3245.42,3827.59 cw(c3245.42,3800.74) 3264.4,3819.72 cw(c3283.39,3838.71) pad.PC27@3256.54,3838.71 ; pad.PC27@3245.42,3838.71 3293.63,3790.5 3363.5,3790.5 3568.5,3585.5 ; pad.PC27@3250.01,3842.75 3279.65,3804.48 ; pad.PC27@3254.13,3845.62 3279.65,3804.48 ; pad.PC27@3258.56,3848.05 3279.65,3804.48 ; pad.PC27@3263.25,3850.03 3279.65,3804.48 ; v1@3583.61,3581.61 ccw(c3574.22,3572.22) 3574.22,3585.5 ccw(c3574.22,3598.78) v1@3583.61,3589.39 ; v1@3586.7,3580.06 3568.5,3585.5 ; v1@3586.7,3590.94 3568.5,3585.5 ; 3568.5,3585.5 v1(3587.5,3585.5) 3568.5,3585.5
LADDR14: pad.PC28 U1.E9 U6.36 U7.36 U10.3 | length 4846.1
  Top Layer w5: U1.E9@2966.87,2763.51 ccw(c2966.87,2776.48) 2976.04,2767.31 ccw(c2985.22,2758.13) U1.E9@2972.24,2758.13 ; U1.E9@2967.87,2758.13 U1.E9@2966.87,2758.13 ; 2973.16,2764.42 cw(c2983,2754.58) v1@2983,2768.5 ; 2973.8,2765.06 ccw(c2964.86,2774) v1@2977.5,2774 ; v1@2978.01,2776.31 U1.E9@2971.1,2754.82 ; v1@2978.7,2777.42 U1.E9@2966.87,2758.13 ; v1@2979.62,2778.34 U1.E9@2963.55,2762.36 ; v1@2985.23,2768.97 U1.E9@2963.55,2762.36 ; v1@2986.35,2769.64 U1.E9@2966.87,2758.13 ; v1@2987.29,2770.55 U1.E9@2971.1,2754.82 ; v1(3831,3097) 3915.48,3097 3952.06,3133.58 ; v1@3831.66,3091.54 3854,3097 v1@3831.66,3102.46 ; v1@3834.89,3093.11 cw(c3844.28,3083.72) 3844.28,3097 cw(c3844.28,3110.28) v1@3834.89,3100.89 ; v1@3934.84,2670.1 U7.36@3945.28,2649.75 ; v1@3935.71,2668.56 U7.36@3952.06,2652.57 ; v1@3937.02,2667.38 U7.36@3957.59,2657.39 ; v1@3944,2675.78 U7.36@3957.59,2657.39 ; v1@3944.05,2667.95 cw(c3930.24,2654.14) U7.36@3949.72,2652.74 ; U6.36@3944.79,3198.65 3952.06,3222.41 ; U6.36@3944.83,3152.96 3952.06,3133.58 ; v1@3944.99,2674.32 U7.36@3952.06,2652.57 ; v1@3945.47,2672.62 U7.36@3945.28,2649.75 ; U6.36@3946.86,3149.07 cw(c3934.33,3136.53) 3952.06,3136.53 cw(c3969.78,3136.53) U6.36@3957.25,3149.07 ; U6.36@3946.86,3202.76 ccw(c3934.33,3215.29) 3952.06,3215.29 ccw(c3969.78,3215.29) U6.36@3957.25,3202.76 ; U7.36@3952.06,2630.91 3952.06,2659.94 v1(3940,2672) ; U6.36@3952.06,3154.26 3952.06,3133.58 ; U6.36@3952.06,3197.57 3952.06,3222.41 ; U6.36@3959.28,3152.96 3952.06,3133.58 ; U6.36@3959.32,3198.65 3952.06,3222.41 ; 4157.2,3326.36 U10.3@4177.13,3326.36 ; U10.3@4175.41,3324.65 ccw(c4171.28,3320.51) 4171.28,3326.36 ccw(c4171.28,3332.2) U10.3@4175.41,3328.07 ; U10.3@4193.18,3329 U10.3@4195.83,3326.36 4013.86,3326.36 3952.06,3264.56 U6.36@3952.06,3175.91 3952.06,3133.58 ; U1.E9@2963.55,2762.36 v1@2982.74,2774 ; U1.E9@2963.55,2762.36 v1(2983,2774) ; U1.E9@2966.87,2758.13 v1@2982.74,2774 ; U1.E9@2966.87,2758.13 v1(2983,2774) ; U1.E9@2971.1,2754.82 v1@2982.74,2774 ; U1.E9@2971.1,2754.82 v1(2983,2774) ; v1@2982.74,2774 v1(2983,2774) ; v1(3940,2672) U7.36@3945.28,2649.75 ; v1(3940,2672) U7.36@3957.59,2657.39 ; v1(3940,2672) U7.36@3952.06,2652.57
  Bottom Layer w5: v1@2979.63,2778.35 2998.5,2789.5 ; v1(2983,2774) 2998.5,2789.5 ; v1@2983,2779.5 ccw(c2983,2792.78) 2992.39,2783.39 ccw(c3001.78,2774) v1@2988.5,2774 ; v1@2987.35,2770.63 2998.5,2789.5 ; pad.PC28@3224.31,3916.74 cw(c3178.82,3915.22) 3211,3883.03 ; pad.PC28@3227.58,3928.77 3211.19,3883.22 ; pad.PC28@3229.31,3916.91 cw(c3194.58,3915.74) 3219.15,3891.18 cw(c3243.71,3866.61) pad.PC28@3244.88,3901.34 ; pad.PC28@3232.28,3926.79 3211.19,3883.22 ; pad.PC28@3234.3,3917.08 cw(c3210.35,3916.27) 3227.3,3899.33 cw(c3244.24,3882.38) pad.PC28@3245.05,3906.33 ; pad.PC28@3236.7,3924.36 3211.19,3883.22 ; pad.PC28@3240.82,3921.49 3211.19,3883.22 ; pad.PC28@3244.71,3896.34 ccw(c3243.19,3850.85) 3211,3883.03 ; pad.PC28@3245.42,3917.45 3211,3883.03 ; pad.PC28@3249.46,3912.85 3211.19,3883.22 ; pad.PC28@3252.33,3908.73 3211.19,3883.22 ; pad.PC28@3254.76,3904.31 3211.19,3883.22 ; pad.PC28@3256.74,3899.61 3211.19,3883.22 ; v1(3831,3097) 3823,3089 3807,3089 ; v1@3934.5,2672 ccw(c3921.22,2672) 3930.61,2681.39 ccw(c3940,2690.78) v1@3940,2677.5 ; v1@3935.73,2668.54 3921.39,2690.61 ; v1@3943.46,2676.27 3921.39,2690.61 ; 2998.5,2789.5 3055.5,2789.5 3071.5,2805.5 3091.42,2805.5 3203.5,2917.58 3203.5,3007.5 ; 3203.5,3007.5 3285,3089 3807,3089 ; 3203.5,3007.5 3203.5,3612 3285.5,3694 3374,3694 3395,3715 3395,3744.85 3368.36,3771.5 3240.5,3771.5 3211,3801 3211,3883.03 ; 3807,3089 3879,3017 3879,2733 v1(3940,2672) 3921.39,2690.61
LADDR15: pad.PC29 U1.C9 U10.2 | length 4371.4
  Top Layer w5: v1@3009.66,2745.38 U1.C9@3025.63,2761.45 ; v1@3011.69,2746.99 U1.C9@3033.18,2753.91 ; v1@3014,2747.5 ccw(c3014,2760.12) 3022.92,2751.2 ; v1@3017.45,2737.72 U1.C9@3033.18,2753.91 ; v1@3019.03,2739.77 U1.C9@3025.63,2761.45 ; v1@3019.5,2742 cw(c3033.43,2742) 3023.58,2751.85 ; U1.C9@3024.49,2758.13 cw(c3011.51,2758.13) 3020.69,2748.96 cw(c3029.86,2739.79) U1.C9@3029.86,2752.76 ; U1.C9@3029.86,2757.14 U1.C9@3029.86,2758.13 ; U10.2@4195.83,3306.67 4224.83,3306.67 ; v1@4214.04,3052.77 4236.11,3067.11 v1@4221.77,3045.04 ; U10.2@4214.53,3306.67 4224.83,3306.67 ; U10.2@4216.24,3304.96 cw(c4220.37,3300.83) 4220.37,3306.67 cw(c4220.37,3312.52) U10.2@4216.24,3308.38 ; v1(4217.5,3048.5) 4239.5,3070.5 4239.5,3292 4224.83,3306.67 ; v1@4217.5,3054 ccw(c4217.5,3067.28) 4226.89,3057.89 ccw(c4236.28,3048.5) v1@4223,3048.5 ; v1(3014,2742) U1.C9@3029.86,2758.13 ; v1(3014,2742) U1.C9@3033.18,2753.91 ; v1(3014,2742) U1.C9@3025.63,2761.45 ; v1(3014,2742) U1.C9@3029.86,2758.13 ; v1@3014,2742.27 U1.C9@3029.86,2758.13 ; v1@3014,2742.27 U1.C9@3033.18,2753.91 ; v1@3014,2742.27 U1.C9@3025.63,2761.45 ; v1@3014,2742.27 U1.C9@3029.86,2758.13 ; U1.C9@3029.86,2758.13 3010.58,2746.3 U1.C9@3029.86,2758.13 ; U1.C9@3029.86,2758.13 3018.36,2738.65 U1.C9@3029.86,2758.13
  SIGNAL_2 w5: v1(3587.69,3617.19) 3656.31,3617.19 3930.5,3343 4025.14,3343 4223.5,3144.64 4223.5,3054.5 v1(4217.5,3048.5) 4217.5,2823.93 4130.57,2737 3721,2737 3683.04,2774.96 v1(3683.04,2801.54) ; v1@3591.58,3613.3 cw(c3600.97,3603.91) 3600.97,3617.19 cw(c3600.97,3630.47) v1@3591.58,3621.08 ; v1@3679.15,2797.65 cw(c3669.76,2788.26) 3683.04,2788.26 cw(c3696.32,2788.26) v1@3686.93,2797.65 ; v1@4212.04,3047.84 4217.5,3025.5 v1@4222.96,3047.84 ; v1@4213.61,3044.61 cw(c4204.22,3035.22) 4217.5,3035.22 cw(c4230.78,3035.22) v1@4221.39,3044.61
  Bottom Layer w5: v1@3014,2736.99 v1(3014,2742) 3017.72,2738.28 3102.71,2738.28 3105.44,2741 3312.36,2741 3320.86,2732.5 3603.58,2732.5 3662.58,2791.5 3664,2791.5 ; pad.PC29@3318.05,3818.49 3369.47,3813.98 ; pad.PC29@3318.74,3823.52 3369.47,3813.98 ; pad.PC29@3319.91,3828.43 3369.47,3813.98 ; pad.PC29@3321.55,3833.17 3369.47,3813.98 ; pad.PC29@3327.4,3843.9 3369.47,3813.98 ; pad.PC29@3330.51,3847.84 3369.47,3813.98 ; pad.PC29@3334,3851.48 3369.47,3813.98 ; pad.PC29@3337.86,3854.79 3369.47,3813.98 ; v1@3583.8,3613.3 ccw(c3574.41,3603.91) 3574.41,3617.19 ccw(c3574.41,3630.47) v1@3583.8,3621.08 ; v1@3586.94,3611.74 3567.35,3617.19 ; v1@3586.94,3622.64 3567.35,3617.19 ; 3666.98,2794.48 3664,2791.5 ; 3667.53,2795.03 cw(c3682.1,2780.45) v1@3683.02,2801.04 ; v1@3679.88,2806.04 3664,2791.5 ; v1@3684.96,2796.39 3664,2791.5 ; 3369.47,3813.98 pad.PC29@3324.16,3838.71 3344.74,3838.71 3449.45,3734 3450.54,3734 3567.35,3617.19 ; 3567.35,3617.19 v1(3587.69,3617.19) 3567.35,3617.19 ; 3664,2791.5 3674.04,2801.54 v1(3683.04,2801.54) 3664,2791.5
LADDR16: pad.PC30 U1.D9 U10.1 | length 4453.3
  Top Layer w5: U1.D9@2998.37,2763.51 ccw(c2998.37,2776.48) 3007.54,2767.31 ccw(c3016.71,2758.13) U1.D9@3003.74,2758.13 ; v1@3008.24,2773.51 cw(c2994.96,2773.51) 3004.35,2764.12 cw(c3013.74,2754.73) v1@3013.74,2768.01 ; v1@3008.7,2775.7 U1.D9@3002.61,2754.83 ; v1@3009.39,2776.87 U1.D9@2998.37,2758.13 ; v1@3010.35,2777.84 U1.D9@2995.06,2762.37 ; v1@3015.94,2768.47 U1.D9@2995.06,2762.37 ; v1@3017.11,2769.16 U1.D9@2998.37,2758.13 ; v1@3018.07,2770.12 U1.D9@3002.61,2754.83 ; U10.1@4195.83,3283.05 4229.5,3249.38 4229.5,3094.5 v1(4208,3073) ; U10.1@4197.71,3287.55 ccw(c4205.25,3284.92) U10.1@4199.6,3279.27 ; U10.1@4202.43,3285.9 ccw(c4213.59,3282) 4205.23,3273.64 ; v1@4204.54,3077.27 4226.61,3091.61 v1@4212.27,3069.54 ; U10.1@4204.72,3280.6 4215.29,3263.59 ; U10.1@4207.15,3284.25 ccw(c4221.93,3279.09) 4210.86,3268.02 ; v1@4208,3078.5 ccw(c4208,3091.78) 4217.39,3082.39 ccw(c4226.78,3073) v1@4213.5,3073 ; U10.1@4210.59,3283.05 4215.29,3263.59 ; U10.1@4211.87,3282.6 ccw(c4230.27,3276.17) 4216.49,3262.39 ; U10.1@4216.59,3280.95 ccw(c4238.61,3273.25) 4222.12,3256.76 ; U10.1@4216.93,3283.54 4215.29,3263.59 ; U1.D9@2995.06,2762.37 v1(3013.74,2773.51) ; U1.D9@2995.06,2762.37 v1(3013.74,2773.51) ; U1.D9@2998.37,2758.13 v1(3013.74,2773.51) ; U1.D9@2998.37,2758.13 v1(3013.74,2773.51) ; U1.D9@3002.61,2754.83 v1(3013.74,2773.51) ; U1.D9@3002.61,2754.83 v1(3013.74,2773.51)
  SIGNAL_2 w5: v1(3606,3601.5) 3657.5,3601.5 3704.5,3554.5 ; v1@3606.66,3596.04 3629,3601.5 v1@3606.66,3606.96 ; v1@3609.89,3597.61 cw(c3619.28,3588.22) 3619.28,3601.5 cw(c3619.28,3614.78) v1@3609.89,3605.39 ; 3691,3568 3704.5,3554.5 ; v1(3717,2818) 3788,2818 3859,2747 4126.43,2747 4202,2822.57 4202,3067 v1(4208,3073) ; v1@3717.66,2812.54 3740,2818 v1@3717.66,2823.46 ; v1@3720.89,2814.11 cw(c3730.28,2804.72) 3730.28,2818 cw(c3730.28,2831.28) v1@3720.89,2821.89 ; v1@4204.11,3076.89 ccw(c4194.72,3086.28) 4208,3086.28 ccw(c4221.28,3086.28) v1@4211.89,3076.89 ; v1@4208,3071.5 v1(4208,3073) ; 3704.5,3554.5 3926,3333 4021,3333 4208,3146 v1(4208,3073)
  Bottom Layer w5: v1(3013.74,2773.51) 3023.57,2773.51 3038.58,2758.5 3070.36,2758.5 3070.58,2758.28 3094.43,2758.28 3109.65,2773.5 3359,2773.5 3364.21,2768.29 3513.58,2768.29 3535.58,2790.29 3632.79,2790.29 3670.5,2828 3707,2828 v1(3717,2818) ; pad.PC30@3303.04,3917.45 cw(c3252.04,3917.45) 3288.1,3881.39 cw(c3324.16,3845.33) pad.PC30@3324.16,3896.33 ; pad.PC30@3306.32,3928.77 3289.93,3883.22 ; pad.PC30@3308.04,3917.45 cw(c3269.11,3917.45) 3296.64,3889.93 cw(c3324.16,3862.4) pad.PC30@3324.16,3901.33 ; pad.PC30@3311.02,3926.79 3289.93,3883.22 ; pad.PC30@3313.04,3917.45 cw(c3286.19,3917.45) 3305.17,3898.46 cw(c3324.16,3879.48) pad.PC30@3324.16,3906.33 ; pad.PC30@3315.44,3924.36 3289.93,3883.22 ; pad.PC30@3319.56,3921.49 3289.93,3883.22 ; pad.PC30@3324.16,3917.45 3286.5,3879.79 3286.5,3823.5 3308.51,3801.49 3367.82,3801.49 3445.31,3724 3446.3,3724 3568.8,3601.5 v1(3606,3601.5) ; pad.PC30@3328.2,3912.85 3289.93,3883.22 ; pad.PC30@3331.07,3908.73 3289.93,3883.22 ; pad.PC30@3333.5,3904.31 3289.93,3883.22 ; pad.PC30@3335.48,3899.61 3289.93,3883.22 ; v1@3602.11,3597.61 ccw(c3592.72,3588.22) 3592.72,3601.5 ccw(c3592.72,3614.78) v1@3602.11,3605.39
LADDR17: pad.PC31 U1.G9 U10.48 | length 3062.7
  Top Layer w5: U1.G9@2903.88,2763.51 ccw(c2903.88,2776.48) 2913.05,2767.31 ccw(c2922.23,2758.13) U1.G9@2909.25,2758.13 ; 2910.17,2764.43 cw(c2920,2754.6) v1@2920,2768.5 ; 2910.79,2765.05 ccw(c2901.84,2774) v1@2914.5,2774 ; v1@2915.01,2776.31 U1.G9@2908.11,2754.82 ; v1@2915.69,2777.42 U1.G9@2903.88,2758.13 ; v1@2916.62,2778.34 U1.G9@2900.56,2762.36 ; v1@2922.23,2768.97 U1.G9@2900.56,2762.36 ; v1@2923.35,2769.64 U1.G9@2903.88,2758.13 ; v1@2924.29,2770.55 U1.G9@2908.11,2754.82 ; v1@3281.54,2836.27 3303.61,2850.61 v1@3289.27,2828.54 ; v1(3285,2832) 3379.5,2926.5 3379.5,3085.5 3356,3109 3356,3208.5 v1(3403,3255.5) ; v1@3285,2837.5 ccw(c3285,2850.78) 3294.39,2841.39 ccw(c3303.78,2832) v1@3290.5,2832 ; v1@3397.5,3255.5 cw(c3384.22,3255.5) 3393.61,3246.11 cw(c3403,3236.72) v1@3403,3250 ; v1@3397.52,3255.98 U10.48@3402.27,3278.49 ; v1@3397.54,3256.18 U10.48@3403,3277.63 ; v1@3397.76,3257.18 U10.48@3407.4,3278.24 ; v1@3398.26,3258.29 U10.48@3412.63,3277.28 ; v1@3398.73,3258.96 3384.39,3236.89 v1@3406.46,3251.23 ; v1@3399.11,3259.39 ccw(c3389.72,3268.78) 3403,3268.78 ccw(c3416.28,3268.78) v1@3406.89,3259.39 ; U10.48@3402.09,3283.61 v1@3403,3257.59 ; v1@3403,3254.97 cw(c3435.99,3254.97) U10.48@3412.88,3278.51 ; 3403,3266.89 cw(c3424.29,3266.89) U10.48@3409.38,3282.08 ; v1@3408.25,3253.87 U10.48@3412.63,3277.28 ; U10.48@3408.42,3283.05 v1@3403,3257.59 ; v1@3408.46,3256.18 U10.48@3403,3277.63 ; v1@3408.44,3256.33 U10.48@3402.27,3278.49 ; v1@3408.49,3255.1 U10.48@3407.4,3278.24 ; U10.48@3414.43,3280.98 v1@3403,3257.59 ; U1.G9@2900.56,2762.36 v1@2919.74,2774 ; U1.G9@2900.56,2762.36 v1(2920,2774) ; U1.G9@2903.88,2758.13 v1@2919.74,2774 ; U1.G9@2903.88,2758.13 v1(2920,2774) ; U1.G9@2908.11,2754.82 v1@2919.74,2774 ; U1.G9@2908.11,2754.82 v1(2920,2774) ; U10.48@3402.27,3278.49 v1(3403,3255.5) ; v1(3403,3255.5) U10.48@3403,3277.63 ; v1(3403,3255.5) U10.48@3412.63,3277.28 ; v1(3403,3255.5) U10.48@3407.4,3278.24
  SIGNAL_1 w5: pad.PC31@3382.58,3832.93 3402.9,3800.09 ; pad.PC31@3387.13,3835.34 3402.9,3800.09 ; pad.PC31@3387.96,3823.77 cw(c3351.91,3787.72) 3402.9,3787.72 cw(c3453.89,3787.72) pad.PC31@3417.83,3823.77 ; pad.PC31@3391.5,3827.31 cw(c3363.98,3799.79) 3402.9,3799.79 cw(c3441.82,3799.79) pad.PC31@3414.3,3827.31 ; pad.PC31@3391.89,3837.11 3402.9,3800.09 ; pad.PC31@3395.03,3830.84 cw(c3376.05,3811.86) 3402.9,3811.86 cw(c3429.75,3811.86) pad.PC31@3410.76,3830.84 ; pad.PC31@3396.8,3838.22 3402.9,3800.09 ; v1@3397.54,3256.13 3402.9,3278.5 ; v1@3399.11,3259.39 ccw(c3389.97,3268.53) 3402.9,3268.53 ; v1@3402.9,3255.6 pad.PC31@3402.9,3838.71 ; 3402.9,3269.02 ccw(c3416.52,3269.02) v1@3406.89,3259.39 ; v1(3403,3255.5) 3402.9,3278.5 ; v1@3408.46,3256.18 3402.9,3278.5 ; pad.PC31@3409,3838.22 3402.9,3800.09 ; pad.PC31@3413.9,3837.11 3402.9,3800.09 ; pad.PC31@3418.66,3835.34 3402.9,3800.09 ; pad.PC31@3423.22,3832.93 3402.9,3800.09
  SIGNAL_2 w5: v1@2916.63,2778.35 2935.5,2789.5 ; v1(2920,2774) 2935.5,2789.5 ; v1@2920,2779.5 ccw(c2920,2792.78) 2929.39,2783.39 ccw(c2938.78,2774) v1@2925.5,2774 ; v1@2924.35,2770.63 2935.5,2789.5 ; v1@3279.59,2830.99 3285,2817.08 ; v1@3281.11,2828.11 cw(c3271.72,2818.72) 3285,2818.72 cw(c3298.28,2818.72) v1@3288.89,2828.11 ; v1@3290.41,2830.99 3285,2817.08 ; 2935.5,2789.5 3257.42,2789.5 3285,2817.08 ; 3285,2817.08 v1(3285,2832) 3285,2817.08
LADDR18: pad.PC32 U1.F9 U10.17 | length 4267.9
  Top Layer w5: U1.F9@2935.37,2763.51 ccw(c2935.37,2776.48) 2944.55,2767.31 ccw(c2953.72,2758.13) U1.F9@2940.75,2758.13 ; v1@2945.5,2773.76 cw(c2932.22,2773.76) 2941.61,2764.37 cw(c2951,2754.98) v1@2951,2768.26 ; v1@2945.97,2775.99 U1.F9@2939.61,2754.82 ; v1@2946.66,2777.13 U1.F9@2935.37,2758.13 ; v1@2947.6,2778.08 U1.F9@2932.06,2762.37 ; v1@2953.23,2768.73 U1.F9@2932.06,2762.37 ; v1@2954.37,2769.42 U1.F9@2935.37,2758.13 ; v1@2955.32,2770.36 U1.F9@2939.61,2754.82 ; v1(3967.5,3602.5) 4195.27,3602.5 U10.17@4195.83,3601.95 ; v1@3968.16,3597.04 3990.5,3602.5 v1@3968.16,3607.96 ; v1@3971.39,3598.61 cw(c3980.78,3589.22) 3980.78,3602.5 cw(c3980.78,3615.78) v1@3971.39,3606.39 ; 4157.2,3602.5 U10.17@4177.13,3601.95 ; 4169.95,3602.5 cw(c4169.95,3594.77) U10.17@4175.41,3600.24 ; U1.F9@2932.06,2762.37 v1(2951,2773.76) ; U1.F9@2932.06,2762.37 v1(2951,2773.76) ; U1.F9@2935.37,2758.13 v1(2951,2773.76) ; U1.F9@2935.37,2758.13 v1(2951,2773.76) ; U1.F9@2939.61,2754.82 v1(2951,2773.76) ; U1.F9@2939.61,2754.82 v1(2951,2773.76)
  Bottom Layer w5: v1(2951,2773.76) 2961.32,2773.76 2977.07,2758.01 3023.49,2758.01 3033.22,2748.28 3098.57,2748.28 3101.3,2751 3316.5,2751 3325,2742.5 3599.14,2742.5 3673.68,2817.04 3692.46,2817.04 3707.5,2802 3731.5,2802 3745,2788.5 3745,2705.5 3796.5,2654 3943.92,2654 3967.5,2677.58 v1(3967.5,3602.5) ; pad.PC32@3391.58,3899.61 3437.13,3883.22 ; pad.PC32@3393.56,3904.31 3437.13,3883.22 ; pad.PC32@3395.99,3908.73 3437.13,3883.22 ; pad.PC32@3398.85,3912.85 3437.13,3883.22 ; pad.PC32@3402.9,3896.33 cw(c3402.9,3845.33) 3438.96,3881.39 cw(c3475.01,3917.45) pad.PC32@3424.02,3917.45 ; pad.PC32@3402.9,3901.33 cw(c3402.9,3862.4) 3430.42,3889.93 cw(c3457.94,3917.45) pad.PC32@3419.02,3917.45 ; pad.PC32@3402.9,3906.33 cw(c3402.9,3879.48) 3421.88,3898.46 cw(c3440.87,3917.45) pad.PC32@3414.02,3917.45 ; pad.PC32@3402.9,3917.45 3443.5,3876.85 3443.5,3755.18 3565.18,3633.5 3936.5,3633.5 v1(3967.5,3602.5) ; pad.PC32@3407.49,3921.49 3437.13,3883.22 ; pad.PC32@3411.61,3924.36 3437.13,3883.22 ; pad.PC32@3416.04,3926.79 3437.13,3883.22 ; pad.PC32@3420.73,3928.77 3437.13,3883.22 ; v1@3962,3602.5 ccw(c3948.72,3602.5) 3958.11,3611.89 ccw(c3967.5,3621.28) v1@3967.5,3608 ; v1@3962.04,3601.84 3967.5,3579.5 ; v1@3963.23,3599.04 3948.89,3621.11 ; v1@3963.61,3598.61 cw(c3954.22,3589.22) 3967.5,3589.22 cw(c3980.78,3589.22) v1@3971.39,3598.61 ; v1@3970.96,3606.77 3948.89,3621.11 ; v1@3972.96,3601.84 3967.5,3579.5 ; 3948.89,3621.11 v1(3967.5,3602.5) ; 3967.5,3579.5 v1(3967.5,3602.5)
LADDR19: pad.PC33 U1.H9 U10.16 | length 4103.1
  Top Layer w5: U1.H9@2872.38,2752.76 cw(c2872.38,2739.79) 2881.56,2748.96 cw(c2890.73,2758.13) U1.H9@2877.76,2758.13 ; v1@2882.5,2742.52 ccw(c2869.22,2742.52) 2878.61,2751.91 ccw(c2888,2761.29) v1@2888,2748.02 ; v1@2882.97,2740.29 U1.H9@2876.62,2761.44 ; v1@2883.66,2739.14 U1.H9@2872.38,2758.13 ; v1@2884.6,2738.19 U1.H9@2869.07,2753.9 ; v1@2890.23,2747.55 U1.H9@2869.07,2753.9 ; v1@2891.37,2746.86 U1.H9@2872.38,2758.13 ; v1@2892.32,2745.92 U1.H9@2876.62,2761.44 ; v1(4128,3582.5) 4151,3582.26 ; v1@4128.24,3582.26 U10.16@4195.83,3582.26 ; v1@4128.6,3577.03 4151,3582.26 ; v1@4128.71,3587.95 4151,3582.26 ; v1@4131.89,3578.61 cw(c4140.71,3569.79) 4140.71,3582.26 ; v1@4131.89,3586.39 ccw(c4141.85,3596.35) 4141.85,3582.26 ; 4157.2,3582.26 U10.16@4177.13,3582.26 ; U10.16@4175.41,3580.55 ccw(c4171.28,3576.42) 4171.28,3582.26 ccw(c4171.28,3588.11) U10.16@4175.41,3583.98 ; U1.H9@2869.07,2753.9 v1(2888,2742.52) ; U1.H9@2869.07,2753.9 v1(2888,2742.52) ; U1.H9@2872.38,2758.13 v1(2888,2742.52) ; U1.H9@2872.38,2758.13 v1(2888,2742.52) ; U1.H9@2876.62,2761.44 v1(2888,2742.52) ; U1.H9@2876.62,2761.44 v1(2888,2742.52)
  SIGNAL_1 w5: v1@4122.54,3581.84 4128,3559.5 v1@4133.46,3581.84 ; v1@4124.11,3578.61 cw(c4114.72,3569.22) 4128,3569.22 cw(c4141.28,3569.22) v1@4131.89,3578.61 ; v1(4128,3582.5) 4128,3510 4151.85,3486.15 4151.85,3231.3 4190.5,3192.64 v1(4190.5,3087) ; v1@4185.04,3087.66 4190.5,3110 v1@4195.96,3087.66 ; v1@4186.61,3090.89 ccw(c4177.22,3100.28) 4190.5,3100.28 ccw(c4203.78,3100.28) v1@4194.39,3090.89
  SIGNAL_2 w5: v1@2891.55,2742.52 2907.56,2726.5 3029.5,2726.5 3051.28,2748.28 3298.21,2748.28 3367.44,2817.5 ; 3367.49,2817.5 3398.49,2848.5 3973.05,2848.5 3997.55,2824 4154.5,2824 4190.5,2860 4190.5,3084.5 v1@4190,3085 ; pad.PC33@3461.32,3832.93 3481.64,3800.09 ; pad.PC33@3465.87,3835.34 3481.64,3800.09 ; pad.PC33@3469.26,3821.59 cw(c3451.73,3797.36) 3481.64,3797.36 ; pad.PC33@3470.63,3837.11 3481.64,3800.09 ; pad.PC33@3472.19,3825.64 cw(c3458.81,3807.15) 3481.64,3807.15 cw(c3504.46,3807.15) pad.PC33@3491.09,3825.64 ; pad.PC33@3475.54,3838.22 3481.64,3800.09 ; pad.PC33@3481.64,3838.71 3481.64,3797.36 ; pad.PC33@3487.74,3838.22 3481.64,3800.09 ; pad.PC33@3492.64,3837.11 3481.64,3800.09 ; pad.PC33@3494.02,3821.59 ccw(c3511.54,3797.36) 3481.64,3797.36 ; pad.PC33@3497.4,3835.34 3481.64,3800.09 ; pad.PC33@3501.95,3832.93 3481.64,3800.09 ; v1@4122.55,3583.2 4128,3604 ; v1@4124.11,3586.39 ccw(c4114.72,3595.78) 4128,3595.78 ccw(c4141.28,3595.78) v1@4131.89,3586.39 ; v1(4128,3582.5) 4128,3604 ; v1@4133.45,3583.2 4128,3604 ; v1@4186.61,3083.11 cw(c4177.22,3073.72) 4190.5,3073.72 cw(c4203.78,3073.72) v1@4194.39,3083.11 ; 3481.64,3797.36 3520.5,3758.5 4078.8,3758.5 4133.5,3703.8 4133.5,3609.5 4128,3604
LADDR20: pad.PC34 U1.D10 U10.9 | length 4554.5
  Top Layer w5: v1@2977.77,2714.51 U1.D10@2994.13,2729.95 ; v1@2979.84,2716.06 U1.D10@3001.68,2722.4 ; v1@2982,2716.5 ccw(c2982,2731.54) 2992.63,2720.9 ; v1@2985.31,2706.61 U1.D10@3001.68,2722.4 ; v1@2986.96,2708.62 U1.D10@2994.13,2729.95 ; v1@2987.5,2711 cw(c2999.02,2711) 2990.87,2719.15 ; U1.D10@2992.99,2726.64 cw(c2980.02,2726.64) 2989.19,2717.46 cw(c2998.37,2708.29) U1.D10@2998.37,2721.26 ; U1.D10@2996.64,2726.64 U1.D10@2998.37,2726.64 ; v1(4123,3444.5) 4146,3444.47 ; v1(4123,3444.5) U10.9@4195.83,3444.47 4222.53,3444.47 ; v1@4123.65,3439.04 4146,3444.47 ; v1@4123.67,3449.96 4146,3444.47 ; v1@4126.89,3440.61 cw(c4136.2,3431.3) 4136.2,3444.47 ; v1@4126.89,3448.39 ccw(c4136.36,3457.86) 4136.36,3444.47 ; 4157.2,3444.47 U10.9@4177.13,3444.47 ; U10.9@4175.41,3442.76 ccw(c4171.28,3438.62) 4171.28,3444.47 ccw(c4171.28,3450.31) U10.9@4175.41,3446.18 ; U10.9@4214.53,3444.47 4222.53,3444.47 ; U10.9@4216.24,3442.76 cw(c4220.37,3438.62) 4220.37,3444.47 cw(c4220.37,3450.31) U10.9@4216.24,3446.18 ; v1(4242.5,3043.5) 4249.5,3050.5 4249.5,3417.5 4222.53,3444.47 ; v1(2982,2711) v1@2982.73,2711 ; v1(2982,2711) U1.D10@2998.37,2726.64 ; v1(2982,2711) U1.D10@3001.68,2722.4 ; v1(2982,2711) U1.D10@2994.13,2729.95 ; v1(2982,2711) U1.D10@2998.37,2726.64 ; v1@2982.73,2711 U1.D10@2998.37,2726.64 ; v1@2982.73,2711 U1.D10@3001.68,2722.4 ; v1@2982.73,2711 U1.D10@2994.13,2729.95 ; v1@2982.73,2711 U1.D10@2998.37,2726.64 ; U1.D10@2998.37,2726.64 2978.71,2715.41 U1.D10@2998.37,2726.64 ; U1.D10@2998.37,2726.64 2986.25,2707.51 U1.D10@2998.37,2726.64
  SIGNAL_2 w5: pad.PC34@3470.32,3899.61 3515.87,3883.22 ; pad.PC34@3472.3,3904.31 3515.87,3883.22 ; pad.PC34@3474.73,3908.73 3515.87,3883.22 ; pad.PC34@3477.59,3912.85 3515.87,3883.22 ; pad.PC34@3481.64,3896.33 cw(c3481.64,3845.33) 3517.7,3881.39 cw(c3553.75,3917.45) pad.PC34@3502.76,3917.45 ; pad.PC34@3481.64,3901.33 cw(c3481.64,3862.4) 3509.16,3889.93 cw(c3536.68,3917.45) pad.PC34@3497.76,3917.45 ; pad.PC34@3481.64,3906.33 cw(c3481.64,3879.48) 3500.62,3898.46 cw(c3519.61,3917.45) pad.PC34@3492.76,3917.45 ; pad.PC34@3481.64,3917.45 3520,3879.09 3520,3802.5 3554,3768.5 4082.94,3768.5 4143.5,3707.94 4143.5,3563.5 4116,3536 4116,3451.5 v1(4123,3444.5) ; pad.PC34@3486.23,3921.49 3515.87,3883.22 ; pad.PC34@3490.35,3924.36 3515.87,3883.22 ; pad.PC34@3494.78,3926.79 3515.87,3883.22 ; pad.PC34@3499.47,3928.77 3515.87,3883.22 ; 4116,3450.54 ccw(c4129.04,3450.54) v1@4119.82,3441.32 ; 4116,3462.61 ccw(c4141.11,3462.61) v1@4123.35,3444.85 ; 4116,3474.68 ccw(c4153.18,3474.68) v1@4126.89,3448.39
  Bottom Layer w5: v1@2978.62,2706.66 2997.72,2695.28 ; v1@2982,2705.5 cw(c2982,2692.22) 2991.39,2701.61 cw(c3000.78,2711) v1@2987.5,2711 ; v1(2982,2711) 2997.72,2695.28 ; v1@2986.34,2714.38 2997.72,2695.28 ; v1@4237,3043.5 cw(c4223.72,3043.5) 4233.11,3034.11 cw(c4242.5,3024.72) v1@4242.5,3038 ; v1@4238.23,3046.96 4223.89,3024.89 ; v1@4243,3043 v1(4242.5,3043.5) ; v1@4245.96,3039.23 4223.89,3024.89 ; 2997.72,2695.28 3117.7,2695.28 3143.42,2721 3304.07,2721 3320.57,2704.5 3723.36,2704.5 3783.86,2644 4113,2644 4196,2727 4196,2997 v1(4242.5,3043.5) ; 4223.89,3024.89 v1(4242.5,3043.5)
LADDR21: pad.PC35 U1.C10 U10.10 | length 3991.6
  Top Layer w5: v1@3010.58,2714.28 U1.C10@3025.61,2729.92 ; v1@3012.7,2716 U1.C10@3033.14,2722.38 ; v1@3015,2716.5 ccw(c3015,2727.9) 3023.06,2719.84 ; v1@3018.5,2706.75 U1.C10@3033.14,2722.38 ; v1@3020.1,2708.94 U1.C10@3025.61,2729.92 ; v1@3020.5,2711 cw(c3035.65,2711) U1.C10@3024.94,2721.71 ; U1.C10@3024.49,2726.64 cw(c3011.51,2726.64) 3020.69,2717.46 cw(c3029.86,2708.29) U1.C10@3029.86,2721.26 ; v1(4136.35,3464.15) U10.10@4195.83,3464.15 4226.35,3464.15 ; v1@4137,3458.69 4159.35,3464.15 v1@4137,3469.61 ; v1@4140.24,3460.26 cw(c4149.62,3450.88) 4149.62,3464.15 cw(c4149.62,3477.43) v1@4140.24,3468.04 ; 4157.2,3464.15 U10.10@4177.13,3464.15 ; U10.10@4175.41,3462.44 ccw(c4171.28,3458.31) 4171.28,3464.15 ccw(c4171.28,3470) U10.10@4175.41,3465.87 ; U10.10@4214.53,3464.15 4226.35,3464.15 ; U10.10@4216.24,3462.44 cw(c4220.37,3458.31) 4220.37,3464.15 cw(c4220.37,3470) U10.10@4216.24,3465.87 ; v1@4233.5,3010.06 4259.5,3036.06 4259.5,3431 4226.35,3464.15 ; v1(3015,2711) U1.C10@3029.86,2726.64 ; v1(3015,2711) U1.C10@3033.14,2722.38 ; v1(3015,2711) U1.C10@3025.61,2729.92 ; v1(3015,2711) U1.C10@3029.86,2726.64 ; v1@3015,2711.78 U1.C10@3029.86,2726.64 ; v1@3015,2711.78 U1.C10@3033.14,2722.38 ; v1@3015,2711.78 U1.C10@3025.61,2729.92 ; v1@3015,2711.78 U1.C10@3029.86,2726.64 ; U1.C10@3029.86,2726.64 3011.53,2715.27 U1.C10@3029.86,2726.64 ; U1.C10@3029.86,2726.64 3019.44,2707.75 U1.C10@3029.86,2726.64
  SIGNAL_2 w5: v1@3011.62,2706.66 3030.72,2695.28 ; v1@3015,2705.5 cw(c3015,2692.22) 3024.39,2701.61 cw(c3033.78,2711) v1@3020.5,2711 ; v1(3015,2711) 3030.72,2695.28 ; v1@3019.34,2714.38 3030.72,2695.28 ; pad.PC35@3540.43,3831.76 3560.38,3806.62 ; pad.PC35@3544.77,3834.66 3560.38,3806.62 ; pad.PC35@3549.42,3836.78 3560.38,3806.62 ; pad.PC35@3552.03,3819.31 cw(c3546.57,3806.62) 3560.38,3806.62 ; pad.PC35@3554,3823.9 cw(c3549.84,3814.22) 3560.38,3814.22 cw(c3570.92,3814.22) pad.PC35@3566.75,3823.9 ; pad.PC35@3554.28,3838.12 3560.38,3806.62 ; pad.PC35@3566.47,3838.12 3560.38,3806.62 ; pad.PC35@3568.73,3819.31 ccw(c3574.19,3806.62) 3560.38,3806.62 ; pad.PC35@3571.33,3836.78 3560.38,3806.62 ; pad.PC35@3575.98,3834.66 3560.38,3806.62 ; pad.PC35@3580.32,3831.76 3560.38,3806.62 ; v1@4130.89,3464.81 4136.35,3487.15 v1@4141.81,3464.81 ; v1@4132.46,3468.04 ccw(c4123.07,3477.43) 4136.35,3477.43 ccw(c4149.62,3477.43) v1@4140.24,3468.04 ; v1(4136.35,3464.15) 4136.35,3542.2 4153.5,3559.36 4153.5,3712.5 4087.5,3778.5 3588.5,3778.5 3560.38,3806.62 ; v1@4228.04,3003.84 4233.5,2981.5 v1@4238.96,3003.84 ; v1@4229.61,3000.61 cw(c4220.22,2991.22) 4233.5,2991.22 cw(c4246.78,2991.22) v1@4237.39,3000.61 ; v1(4233.5,3004.5) 4233.5,2825.78 4134.72,2727 3154.5,2727 3122.78,2695.28 3030.72,2695.28 ; 3560.38,3806.62 pad.PC35@3560.38,3838.71 3560.38,3806.62